# Altium PCB 2403_HDD_ROM_Emulator.PcbDoc
Units mm, origin at the board's own origin, x right, y up, seen from the top; angles counter-clockwise.
Board outline 99 x 213 mm, 2 copper layers (Top Layer, Bottom Layer); 49 components, 131 nets, 498 pads, 169 vias.
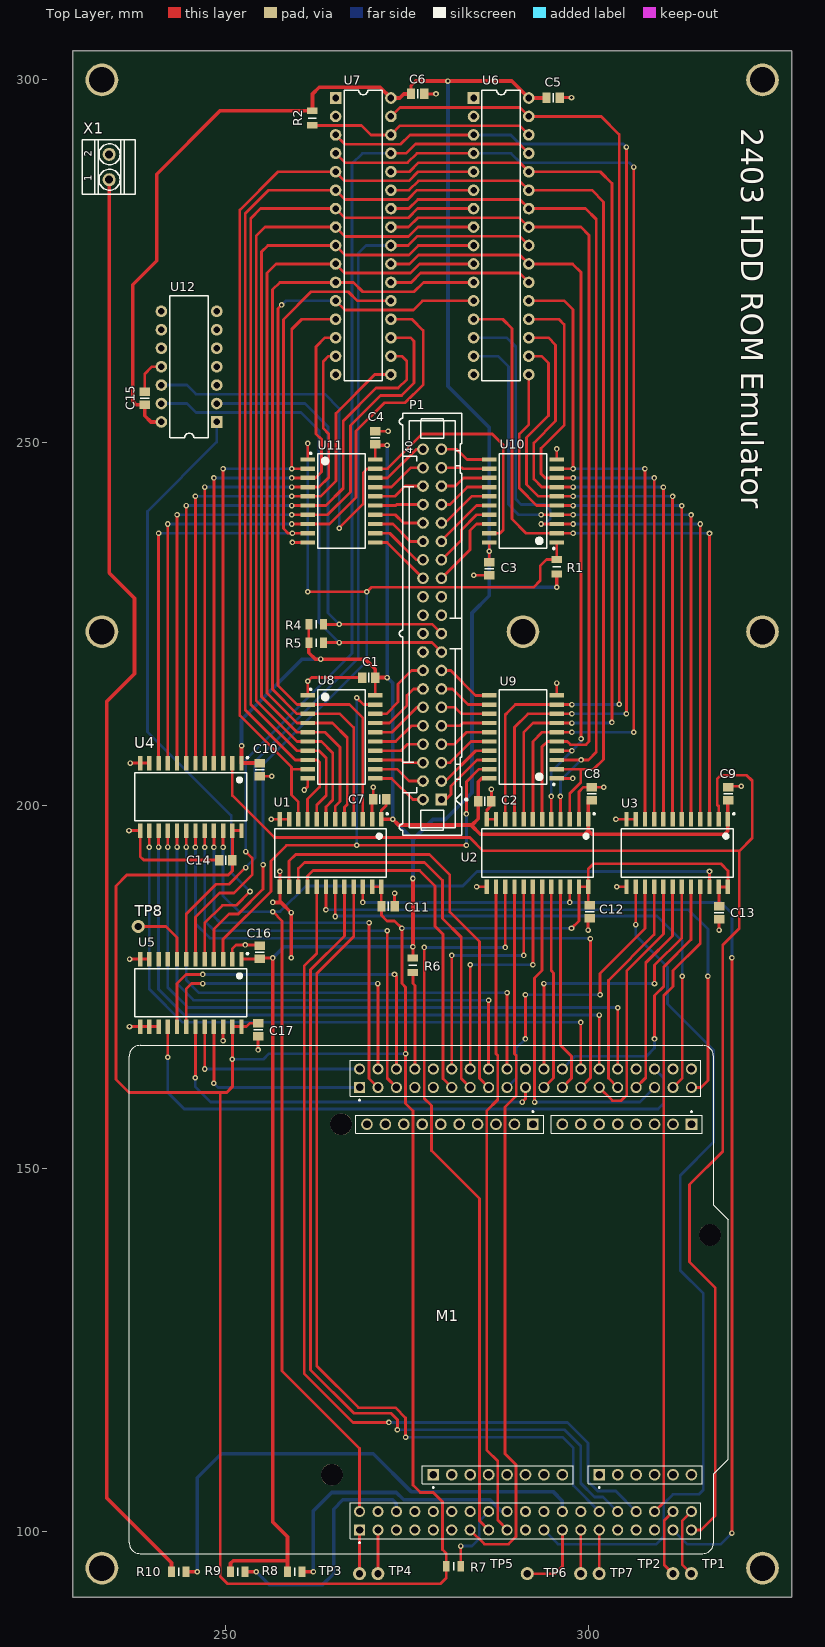
[diagram p0: Top Layer view]
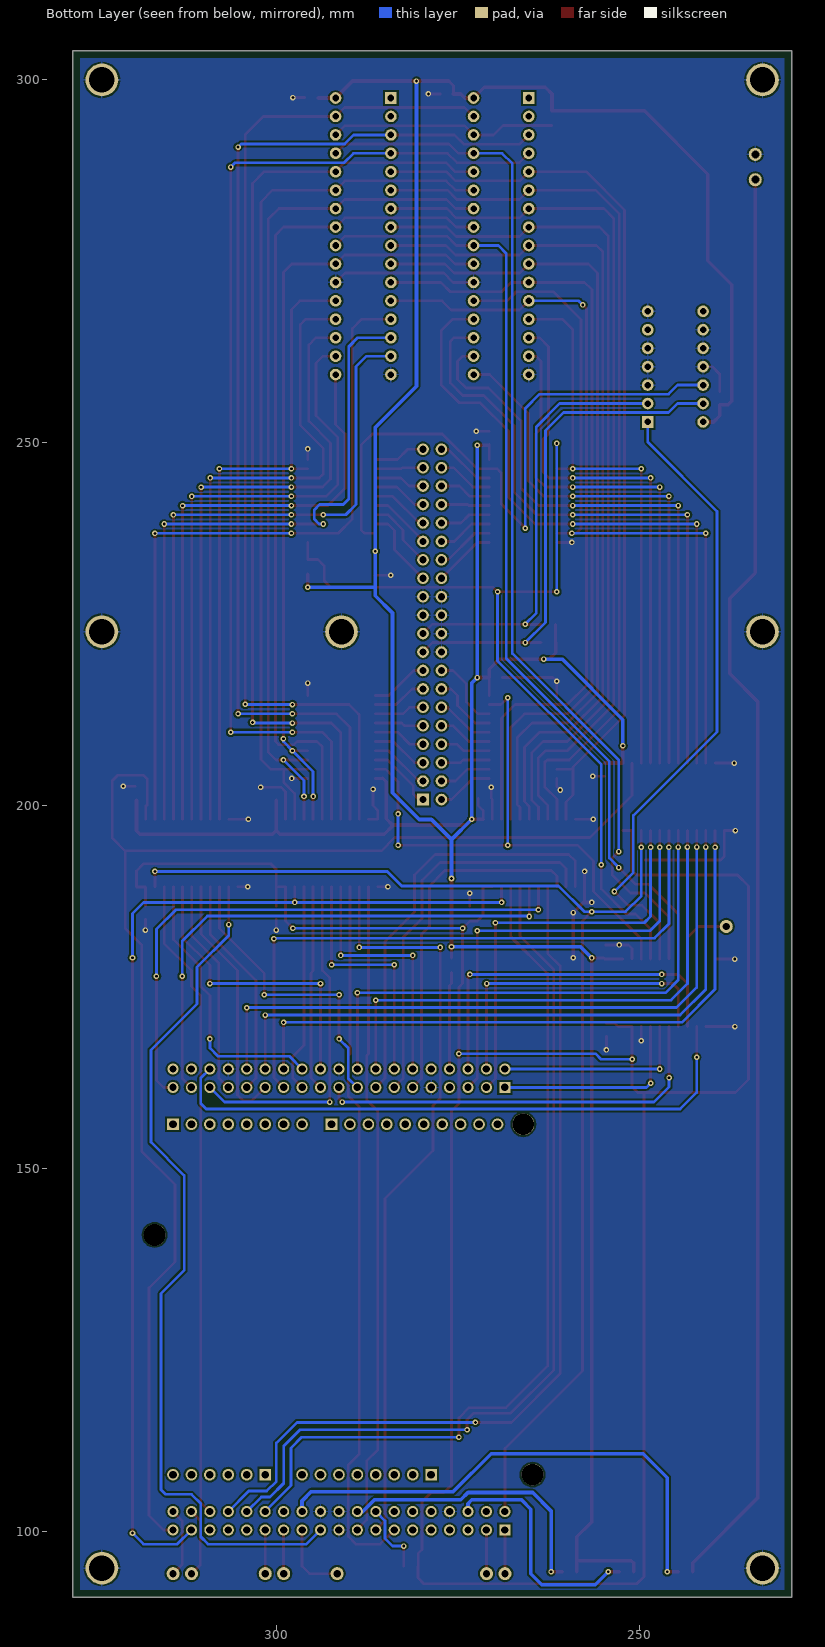
[diagram p1: Bottom Layer view, seen from below]
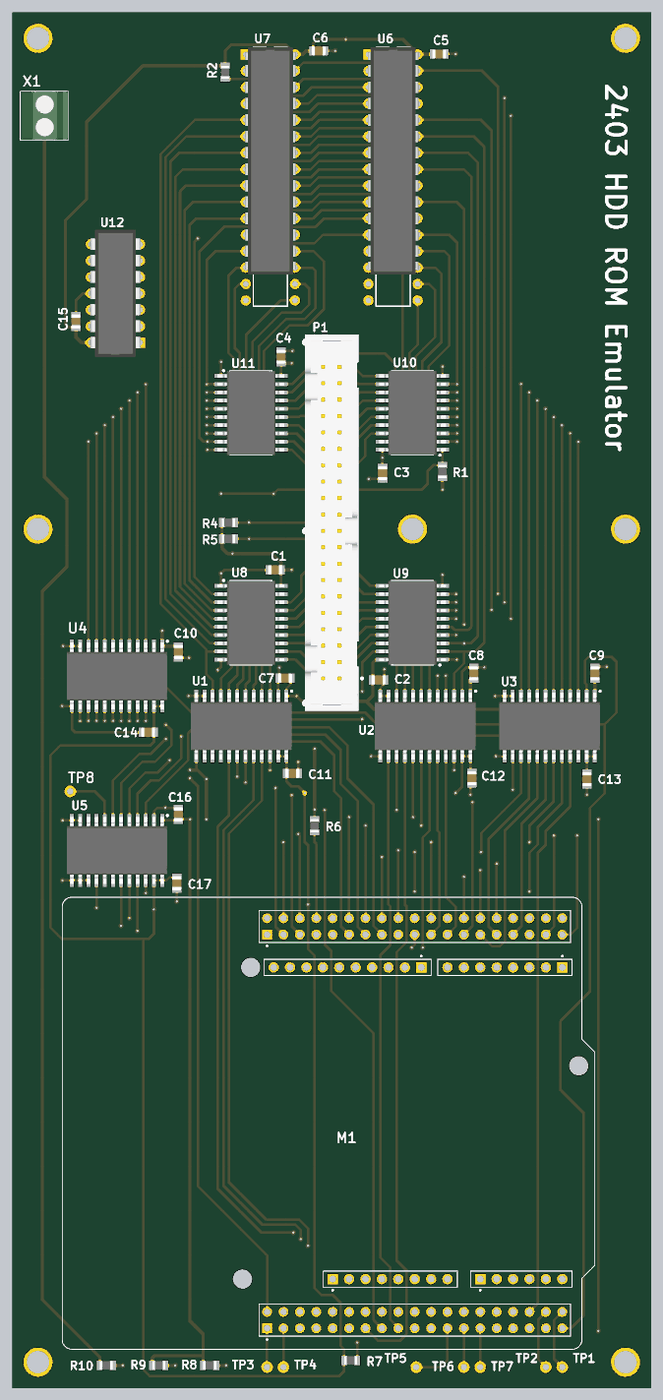
[diagram p2: 3D render of the assembled board from above, using the file's embedded part models]

## Layer stack, top to bottom
Top Layer: signal copper 0.0356
Dielectric: dielectric 0.32, FR-4, Dk 4.8
Bottom Layer: signal copper 0.0356

## Board outline
229,91 328,91 328,304 229,304 229,91

## Design rules (kind name [scope] priority, off if disabled: settings)
Clearance [All] p1: gap=0.254
HoleSize [All] p1: absolutevalues=TRUE maxlimit=5 minlimit=0.025 maxpercent=80.000 minpercent=20.000
PolygonConnect PolygonConnect_1 [IsVia vs IsNamedPolygon('Bot-Layer-GND')] p1: connectstyle=Direct reliefconductorwidth=0.254 reliefentries=4 polygonreliefangle="90 Angle" airgapwidth=0.254
PolygonConnect [All] p2: connectstyle=Relief reliefconductorwidth=0.254 reliefentries=4 polygonreliefangle="90 Angle" airgapwidth=0.254
RoutingVias [All] p1: holewidth=0.381 width=1.27 viastyle="Through Hole" minholewidth=0.254 minwidth=0.508 maxholewidth=0.711 maxwidth=1.27
SilkToSilkClearance [All] p1: silktosilkclearance=0.127
SilkToSolderMaskClearance [IsPad] p1: minsilkscreentomaskgap=0.127 clearancetoexposedcopper=TRUE
SolderMaskExpansion [All] p1: expansion=0.102
Width [All] p1: maxlimit=0.762 minlimit=0.254 preferedwidth=0.381
25 further rules are at their usual default settings.

## Classes and differential pairs
component class S2: C1 C2 C3 C4 C5 C6 R1 R2 U6 U7 U8 U9 U10 U11
component class S1: C7 C8 C9 C10 C11 C12 C13 C14 C16 C17 M1 R6 R7 R8 R9 R10 TP1 TP2 TP3 TP4 TP5 TP6 TP7 TP8 U1 U2 U3 U4 U5
component class 2403_HDD_ROM_Emulator: C15 P1 R4 R5 U12 X1

## Components (designator, comment, footprint, x,y, rotation, side; value= is the part's Value field where it differs from the comment)
C1 "0.1uF" 0805_CAPC2013X100N 269.748,217.678 r0 top
C2 "0.1uF" 0805_CAPC2013X100N 285.75,200.66 r180 top locked
C3 "0.1uF" 0805_CAPC2013X100N 286.385,232.664 r90 top
C4 "0.1uF" 0805_CAPC2013X100N 270.637,250.698 r270 top
C5 "0.1uF" 0805_CAPC2013X100N 295.148,297.561 r180 top locked
C6 "0.1uF" 0805_CAPC2013X100N 276.479,298.069 r180 top locked
C7 "0.1uF" 0805_CAPC2013X100N 271.272,200.914 r0 top locked
C8 "0.1uF" 0805_CAPC2013X100N 300.482,201.676 r270 top locked
C9 "0.1uF" 0805_CAPC2013X100N 319.278,201.676 r270 top
C10 "0.1uF" 0805_CAPC2013X100N 254.762,204.978 r90 top
C11 "0.1uF" 0805_CAPC2013X100N 272.415,186.182 r180 top locked
C12 "0.1uF" 0805_CAPC2013X100N 300.228,185.42 r90 top locked
C13 "0.1uF" 0805_CAPC2013X100N 318.008,185.293 r90 top locked
C14 "0.1uF" 0805_CAPC2013X100N 250.063,192.532 r0 top locked
C15 "0.1uF" 0805_CAPC2013X100N 238.887,256.159 r270 top
C16 "0.1uF" 0805_CAPC2013X100N 254.762,179.832 r90 top
C17 "0.1uF" 0805_CAPC2013X100N 254.508,169.164 r270 top
M1 "NUCLEO-F030R8" MODULE_NUCLEO-F030R8 278,132 r90 top locked
P1 "PLD-40" PLD40_3M_2540-6002RB 278.5,225 r90 top locked
R1 "1K" 0805_RESC2013X84N 295.656,232.918 r270 top locked
R2 "1K" 0805_RESC2013X84N 262,294.75 r90 top locked
R4 "1K" 0805_RESC2013X84N 262.5,225 r180 top locked
R5 "1K" 0805_RESC2013X84N 262.5,222.5 r180 top locked
R6 "0" 0805_RESC2013X84N 275.844,178.054 r90 top
R7 "0" 0805_RESC2013X84N 281.432,95.25 r180 top
R8 "0" 0805_RESC2013X84N 259.588,94.488 r180 top
R9 "0" 0805_RESC2013X84N 251.714,94.488 r180 top
R10 "0" 0805_RESC2013X84N 243.586,94.488 r180 top
TP1 "TEST_POINT" TEST2 314.198,94.234 r0 top
TP2 "TEST_POINT" TEST2 311.658,94.234 r90 top
TP3 "TEST_POINT" TEST2 268.478,94.234 r90 top
TP4 "TEST_POINT" TEST2 271.018,94.234 r90 top
TP5 "TEST_POINT" TEST2 291.592,94.234 r90 top
TP6 "TEST_POINT" TEST2 298.958,94.234 r90 top
TP7 "TEST_POINT" TEST2 301.498,94.234 r90 top
TP8 "TEST_POINT" TEST2 237.998,183.388 r90 top locked
U1 "74LVC4245A" SOIC127P1032X265-24N 264.5,193.5 r270 top locked
U2 "74LVC4245A" SOIC127P1032X265-24N 293,193.5 r270 top locked
U3 "74LVC4245A" SOIC127P1032X265-24N 312.25,193.5 r270 top
U4 "74LVC4245A" SOIC127P1032X265-24N 245.25,201.25 r270 top locked
U5 "74LVC4245A" SOIC127P1032X265-24N 245.25,174.25 r270 top locked
U6 "IS61C512" DIP32-300 288,281 r0 top locked
U7 "IS61C512" DIP32-300 269,281 r0 top locked
U8 "74LS245" SOIC127P1030X265-20N 266,209.5 r0 top locked
U9 "74LS245" SOIC127P1030X265-20N 291,209.5 r180 top locked
U10 "74LS245" SOIC127P1030X265-20N 291,242 r180 top locked
U11 "74LS245" SOIC127P1030X265-20N 266,242 r0 top locked
U12 "74ALS11AD" DIP14-300 245,260.5 r180 top
X1 "DG306-5.0 2" PHOENIX_3.5mm 234,288 r90 top

## Footprints (in the part's own frame and the unit in brackets; to place one, negate y for a bottom-side part, rotate by r counter-clockwise, add the part's x,y. Pads: shape width x height; smd on the part's side, far side on the other; paste and mask are expansions set on the pad)
0805_CAPC2013X100N [mm] "Capacitor, Non-Polarized, Chip; 2.00mm L X 1.25mm W X 0.9mm H, IPC Medium Density"
  rect 1.15x1.45 smd: 1(-0.9,0) 2(0.9,0)
  silkscreen extent 0,-0.63 0,0.63, body extent -1.1,-0.72 1.1,0.73, height 1
0805_RESC2013X84N [mm] "Chip Resistor, EIA 0805, Metric 2013, Body 2.03x1.27mm, IPC Medium Density"
  rect 0.95x1.45 smd: 1(-1,0) 2(1,0)
  silkscreen extent 0,-0.55 0,0.55, body extent -1.02,-0.63 1.02,0.64, height 0.84
DIP14-300 [mm] "DIP 14 Leads, Row Spacing 7.62 mm; Pitch 2.54 mm"
  rect 1.6x1.6 hole 0.9: 1(-3.81,7.62)
  round 1.6 hole 0.9: 2(-3.81,5.08) 3(-3.81,2.54) 4(-3.81,0) 5(-3.81,-2.54) 6(-3.81,-5.08) 7(-3.81,-7.62) 8(3.81,-7.62) 9(3.81,-5.08) 10(3.81,-2.54) 11(3.81,0) 12(3.81,2.54) 13(3.81,5.08) 14(3.81,7.62)
  silkscreen extent -2.65,-9.8 2.65,9.8, body extent -3.93,-9.84 3.94,9.85, height 5.33
DIP32-300 [mm] "DIP 32 Leads, Row Spacing 7.62mm; Pitch 2.54mm"
  rect 1.6x1.6 hole 0.9: 1(-3.81,16.51)
  round 1.6 hole 0.9: 2(-3.81,13.97) 3(-3.81,11.43) 4(-3.81,8.89) 5(-3.81,6.35) 6(-3.81,3.81) 7(-3.81,1.27) 8(-3.81,-1.27) 9(-3.81,-3.81) 10(-3.81,-6.35) 11(-3.81,-8.89) 12(-3.81,-11.43) 13(-3.81,-13.97) 14(-3.81,-16.51) 15(-3.81,-19.05) 16(-3.81,-21.59) 17(3.81,-21.59) 18(3.81,-19.05) 19(3.81,-16.51) 20(3.81,-13.97) 21(3.81,-11.43) 22(3.81,-8.89) 23(3.81,-6.35) 24(3.81,-3.81) 25(3.81,-1.27) 26(3.81,1.27) 27(3.81,3.81) 28(3.81,6.35) 29(3.81,8.89) 30(3.81,11.43) 31(3.81,13.97) 32(3.81,16.51)
  silkscreen extent -2.65,-22.47 2.65,17.59, body extent -3.93,-17.59 3.94,17.59, height 4.57
MODULE_NUCLEO-F030R8 [mm]
  rect 1.605x1.605 hole 1.07: CN5_1(24.13,-14.37) CN6_1(-24.13,-0.65) CN8_1(-24.13,-23.51) CN9_1(24.13,-36.21)
  round 1.605 hole 1.07: CN5_2(24.13,-11.83) CN5_3(24.13,-9.29) CN5_4(24.13,-6.75) CN5_5(24.13,-4.21) CN5_6(24.13,-1.67) CN5_7(24.13,0.87) CN5_8(24.13,3.41) CN5_9(24.13,5.95) CN5_10(24.13,8.49) CN6_2(-24.13,-3.19) CN6_3(-24.13,-5.73) CN6_4(-24.13,-8.27) CN6_5(-24.13,-10.81) CN6_6(-24.13,-13.35) CN6_7(-24.13,-15.89) CN6_8(-24.13,-18.43) CN8_2(-24.13,-26.05) CN8_3(-24.13,-28.59) CN8_4(-24.13,-31.13) CN8_5(-24.13,-33.67) CN8_6(-24.13,-36.21) CN9_2(24.13,-33.67) CN9_3(24.13,-31.13) CN9_4(24.13,-28.59) CN9_5(24.13,-26.05) CN9_6(24.13,-23.51) CN9_7(24.13,-20.97) CN9_8(24.13,-18.43)
  rect 1.53x1.53 hole 1.02: CN7_1(-31.75,9.51) CN10_1(29.21,9.51)
  round 1.53 hole 1.02: CN7_2(-29.21,9.51) CN7_3(-31.75,6.97) CN7_4(-29.21,6.97) CN7_5(-31.75,4.43) CN7_6(-29.21,4.43) CN7_7(-31.75,1.89) CN7_8(-29.21,1.89) CN7_9(-31.75,-0.65) CN7_10(-29.21,-0.65) CN7_11(-31.75,-3.19) CN7_12(-29.21,-3.19) CN7_13(-31.75,-5.73) CN7_14(-29.21,-5.73) CN7_15(-31.75,-8.27) CN7_16(-29.21,-8.27) CN7_17(-31.75,-10.81) CN7_18(-29.21,-10.81) CN7_19(-31.75,-13.35) CN7_20(-29.21,-13.35) CN7_21(-31.75,-15.89) CN7_22(-29.21,-15.89) CN7_23(-31.75,-18.43) CN7_24(-29.21,-18.43) CN7_25(-31.75,-20.97) CN7_26(-29.21,-20.97) CN7_27(-31.75,-23.51) CN7_28(-29.21,-23.51) CN7_29(-31.75,-26.05) CN7_30(-29.21,-26.05) CN7_31(-31.75,-28.59) CN7_32(-29.21,-28.59) CN7_33(-31.75,-31.13) CN7_34(-29.21,-31.13) CN7_35(-31.75,-33.67) CN7_36(-29.21,-33.67) CN7_37(-31.75,-36.21) CN7_38(-29.21,-36.21) CN10_2(31.75,9.51) CN10_3(29.21,6.97) CN10_4(31.75,6.97) CN10_5(29.21,4.43) CN10_6(31.75,4.43) CN10_7(29.21,1.89) CN10_8(31.75,1.89) CN10_9(29.21,-0.65) CN10_10(31.75,-0.65) CN10_11(29.21,-3.19) CN10_12(31.75,-3.19) CN10_13(29.21,-5.73) CN10_14(31.75,-5.73) CN10_15(29.21,-8.27) CN10_16(31.75,-8.27) CN10_17(29.21,-10.81) CN10_18(31.75,-10.81) CN10_19(29.21,-13.35) CN10_20(31.75,-13.35) CN10_21(29.21,-15.89) CN10_22(31.75,-15.89) CN10_23(29.21,-18.43) CN10_24(31.75,-18.43) CN10_25(29.21,-20.97) CN10_26(31.75,-20.97) CN10_27(29.21,-23.51) CN10_28(31.75,-23.51) CN10_29(29.21,-26.05) CN10_30(31.75,-26.05) CN10_31(29.21,-28.59) CN10_32(31.75,-28.59) CN10_33(29.21,-31.13) CN10_34(31.75,-31.13) CN10_35(29.21,-33.67) CN10_36(31.75,-33.67) CN10_37(29.21,-36.21) CN10_38(31.75,-36.21)
  round 3 hole 3 unplated: ""(-24.13,13.32) ""(8.89,-38.75) ""(24.13,12.05)
  silkscreen extent -35,-41.25 35,41.25
PHOENIX_3.5mm [mm] "Terminal Block, 10A 160V, Pitch 3.5mm, 2 Positions, Screw Connection"
  round 1.8 hole 1.1: 1(-1.75,0) 2(1.75,0)
  silkscreen extent -3.75,-3.6 3.75,3.7, body extent -3.75,-3.6 3.75,3.7, height 8.5
PLD40_3M_2540-6002RB [mm] "40 Contacts - Straight .100\" x .100\" Low Profile Four-Wall Header"
  rect 1.6x1.6 hole 1: 1(-24.13,-1.27)
  round 1.6 hole 1: 2(-24.13,1.27) 3(-21.59,-1.27) 4(-21.59,1.27) 5(-19.05,-1.27) 6(-19.05,1.27) 7(-16.51,-1.27) 8(-16.51,1.27) 9(-13.97,-1.27) 10(-13.97,1.27) 11(-11.43,-1.27) 12(-11.43,1.27) 13(-8.89,-1.27) 14(-8.89,1.27) 15(-6.35,-1.27) 16(-6.35,1.27) 17(-3.81,-1.27) 18(-3.81,1.27) 19(-1.27,-1.27) 20(-1.27,1.27) 21(1.27,-1.27) 22(1.27,1.27) 23(3.81,-1.27) 24(3.81,1.27) 25(6.35,-1.27) 26(6.35,1.27) 27(8.89,-1.27) 28(8.89,1.27) 29(11.43,-1.27) 30(11.43,1.27) 31(13.97,-1.27) 32(13.97,1.27) 33(16.51,-1.27) 34(16.51,1.27) 35(19.05,-1.27) 36(19.05,1.27) 37(21.59,-1.27) 38(21.59,1.27) 39(24.13,-1.27) 40(24.13,1.27)
  silkscreen extent -29.06,-4.85 29.06,4.52, body extent -29.06,-4.06 29.06,4.57, height 9.65
SOIC127P1030X265-20N [mm] "SOIC 20, Pitch 1.27mm - Body 7.5x12.8mm, IPC Medium Density"
  rect 2x0.6 smd: 1(-4.65,5.715) 2(-4.65,4.445) 3(-4.65,3.175) 4(-4.65,1.905) 5(-4.65,0.635) 6(-4.65,-0.635) 7(-4.65,-1.905) 8(-4.65,-3.175) 9(-4.65,-4.445) 10(-4.65,-5.715) 11(4.65,-5.715) 12(4.65,-4.445) 13(4.65,-3.175) 14(4.65,-1.905) 15(4.65,-0.635) 16(4.65,0.635) 17(4.65,1.905) 18(4.65,3.175) 19(4.65,4.445) 20(4.65,5.715)
  silkscreen extent -4.37,-6.5 3.25,6.67, body extent -5.18,-6.5 5.18,6.5, height 1.68
SOIC127P1032X265-24N [mm] "SOIC, 1.27mm Pitch; 24 Pin,7.50mm W X 15.40mm L X 2.65mm H Body, IPC Medium Density"
  rect 2x0.6 smd: 1(-4.65,6.985) 2(-4.65,5.715) 3(-4.65,4.445) 4(-4.65,3.175) 5(-4.65,1.905) 6(-4.65,0.635) 7(-4.65,-0.635) 8(-4.65,-1.905) 9(-4.65,-3.175) 10(-4.65,-4.445) 11(-4.65,-5.715) 12(-4.65,-6.985) 13(4.65,-6.985) 14(4.65,-5.715) 15(4.65,-4.445) 16(4.65,-3.175) 17(4.65,-1.905) 18(4.65,-0.635) 19(4.65,0.635) 20(4.65,1.905) 21(4.65,3.175) 22(4.65,4.445) 23(4.65,5.715) 24(4.65,6.985)
  silkscreen extent -5.52,-7.7 3.32,7.93, body extent -5.18,-7.8 5.18,7.8, height 1.68
TEST2 [mm]
  round 1.8 hole 1: 1(0,0)

## Part data
C1 C2 C3 C4 C5 C6 C7 C8 C9 C10 C11 C12 C13 C14 C15 C16 C17: library part "Cap SMD", "Capacitor SMD"
M1: "STM32F030R8, mbed-Enabled Development Nucleo-64 STM32F0 ARM® Cortex®-M0 MCU 32-Bit Embedded Evaluation Board"
P1: "40pin 2.54mm pitch plug"
R1 R2 R4 R5 R6 R7 R8 R9 R10: library part "Resistor SMD L", "SMD Resistor"
TP1 TP2 TP3 TP4 TP5 TP6 TP7 TP8: "Test point"
U1 U2 U3 U4 U5: "Octal Bus Transceiver and 3.3-V to 5-V Shifter / With 3-State Outputs"
U6 U7: "64KB static RAM"
U8 U9 U10 U11: library part 74ABT245, "Bus former"
U12: "Ê1533ËÈ3 Triple 3-Input Positive-AND Gate"
X1: library part CON_Plug2, "2pin connector"

## Free pads (board coordinates)
  round 4.5 hole 3.5: 0(233,95) 0(233,224) 0(233,300) 0(291,224) 0(324,95) 0(324,224) 0(324,300)

## Via types
v1: diameter 0.762, hole 0.381, Top Layer to Bottom Layer, tented both sides, 168 vias
v2: diameter 0.762, hole 0.381, Top Layer to Bottom Layer, 1 vias

## Nets (pads, with @x,y where several pads share a name; then routed paths per layer and width w, separated by ;. In a path a pad name is that pad's centre, name@x,y a point inside that pad or via, vN(x,y) a via of type N, cw(c..) or ccw(c..) an arc to the next point about the centre after c; other vN are vias at no path point)
+3.3V: C11.2 C12.2 C13.2 C14.2 C17.1 R7.2 U1.23 U1.24 U2.23 U2.24 U3.23 U3.24 U4.23 U4.24 U5.23 U5.24 | length 365.8
  Top Layer w0.381: U5.23 U5.24 252.912,169.6 253.376,170.064 C17.1 ; U4.23 U4.24 ; U1.23 U1.24 ; v1(274.828,165.862) 274.828,159.004 275.844,157.988 275.844,106.426 276.86,105.41 278.638,105.41 279.908,104.14 279.908,97.536 280.432,97.012 R7.2 ; v1(297.688,183.134) 298.715,184.161 U2.23 299.963,188.85 U2.24@299.974,188.839 ; C12.2@299.985,186.204 U2.24 299.985,191.273 300.736,192.024 318.262,192.024 319.235,191.051 U3.24 ; C13.2 318.008,188.807 U3.24@319.192,188.807
  Top Layer w0.4: C14.2 250.963,191.019 250.444,190.5 236.474,190.5 234.95,188.976 234.95,162.306 236.728,160.528 249.301,160.528 ; U5.23 250.965,161.303 250.19,160.528 249.301,160.528 ; C14.2@250.965,192.534 U4.23 ; C11.2@271.485,186.212 U1.24 ; C11.2 271.515,184.923 272.288,184.15 273.304,184.15 v2(274.32,183.134) 274.32,175.514 274.828,175.006 v1(274.828,165.862) ; R7.2 280.432,93.615 279.654,92.837 250.317,92.837 249.301,93.853 249.301,160.528
  Bottom Layer w0.381: v1(250.952,165.1) 255.27,165.1 256.032,165.862 v1(274.828,165.862) ; v2(274.32,183.134) v1(297.688,183.134)
+5V: C1.2 C2.2 C3.2 C4.2 C5.2 C6.2 C7.2 C8.2 C9.2 C10.2 C15.2 C16.1 R1.2 R2.2 R4.2 R5.2 R6.2 R8.2 R9.2 U1.1 U2.1 U3.1 U4.1 U5.1 U6.32 U7.32 U8.20 U9.20 U10.20 U11.20 U12.14 | length 532.8
  Top Layer w0.381: C15.2@238.876,255.27 C15.2 ; U5.1 C16.1@254.73,178.9 ; C16.1@254.884,179.054 v1(256.54,179.054) ; R5.2 R4.2 ; U11.20@270.637,247.728 C4.2 ; U8.20 C1.2@270.65,217.678 ; U1.1 271.485,199.349 272.172,200.036 C7.2@272.172,201.041 ; C6.2 275.579,299.201 276.225,299.847 ; R6.2 v1(275.844,180.594) ; 285.319,203.785 U9.20 ; C3.2@286.35,233.853 v1(286.35,235.069) U10.20
  Top Layer w0.5: C15.2@238.876,255.27 237.744,255.27 237.236,255.778 237.236,271.78 240.538,275.082 240.538,287.02 249.268,295.75 R2.2 262,298.068 262.932,299 271.32,299 U7.32 274.015,297.51 274.574,298.069 C6.2 ; C15.2 238.887,253.746 239.753,252.88 U12.14 ; R9.2 250.714,95.647 251.079,96.012 258.572,96.012 ; v1(252.235,208.267) U4.1 C10.2@254.74,205.9 ; v1(256.54,179.054) 256.54,101.346 258.572,99.314 258.572,96.012 ; R8.2@258.572,94.488 258.572,96.012 ; R5.2 261.5,221.1 262.382,220.218 v1(263.144,220.218) 269.24,220.218 270.65,218.808 270.65,217.678 v1(272.288,217.678) ; C4.2@270.753,249.682 v1(272.288,249.682) ; U1.1 v1(273.05,198.15) 273.842,197.358 283.972,197.358 ; v1(275.844,180.594) v1(275.844,189.992) ; 276.225,299.847 v1(280.67,299.847) 289.473,299.847 U6.32 C5.2@294.197,297.51 ; 285.319,203.785 284.85,203.316 284.85,198.236 283.972,197.358 ; v1(295.656,230.124) R1.2 ; C8.2@299.985,200.765 U2.1 299.985,196.607 ; C9.2@319.235,200.733 U3.1 319.235,196.553 318.77,196.088 300.504,196.088 299.985,196.607 ; 283.972,197.358 283.909,197.294 285.115,196.088 299.466,196.088 299.985,196.607
  Bottom Layer w0.5: v1(252.235,208.267) 252.235,211.849 260.604,220.218 v1(263.144,220.218) ; v1(256.54,179.054) 258.08,180.594 v1(275.844,180.594) ; v1(272.288,249.682) v1(272.288,217.678) 273.05,216.916 v1(273.05,198.15) 275.844,195.356 ; v1(275.844,189.992) 275.844,195.356 ; v1(280.67,299.847) 280.67,257.81 286.35,252.13 v1(286.35,235.069) 286.35,228.946 283.972,226.568 283.972,201.803 280.289,198.12 278.608,198.12 275.844,195.356 ; 286.385,230.124 v1(295.656,230.124)
A0: U1.3 U6.12 U7.12 U8.2 | length 107.9
  Top Layer w0.381: v1(257.75,269) 257.25,268.5 257.25,216.587 259.892,213.945 U8.2 267.105,213.945 268.945,212.105 U1.3 ; U7.12 266.46,268.3 275.9,268.3 277.17,269.57 U6.12
  Bottom Layer w0.381: v1(257.75,269) 258.32,269.57 U7.12
A1: U1.4 U6.11 U7.11 U8.3 | length 110.2
  Top Layer w0.381: U1.4 267.675,210.775 265.775,212.675 U8.3 259.892,212.675 256.5,216.067 256.5,271.105 257.505,272.11 U7.11 267.64,272.11 268.934,270.816 276.016,270.816 277.31,272.11 U6.11
A2: U1.5 U6.10 U7.10 U8.4 | length 112.8
  Top Layer w0.381: U1.5 266.405,199.805 266.8,200.2 266.8,209.375 264.77,211.405 U8.4 259.892,211.405 255.75,215.547 255.75,273.403 256.997,274.65 U7.10 266.44,273.4 275.5,273.4 276.75,274.65 U6.10
A3: U1.6 U6.9 U7.9 U8.5 | length 115.8
  Top Layer w0.381: U1.6 265.135,199.935 265.8,200.6 265.8,208.075 263.74,210.135 U8.5 259.892,210.135 255,215.027 255,276.336 255.854,277.19 U7.9 266.48,275.9 275.3,275.9 276.59,277.19 U6.9
A4: U1.7 U6.8 U7.8 U8.6 | length 118.6
  Top Layer w0.381: U1.7 263.865,199.865 264.8,200.8 264.8,207.3 263.235,208.865 U8.6 259.892,208.865 254.25,214.507 254.25,278.507 255.473,279.73 U7.8 266.482,278.438 275.238,278.438 276.53,279.73 U6.8
A5: U1.8 U6.7 U7.7 U8.7 | length 121.7
  Top Layer w0.381: U1.8 262.595,200.095 263.9,201.4 263.9,206.6 262.905,207.595 U8.7 259.892,207.595 253.5,213.987 253.5,280.932 254.838,282.27 U7.7 266.46,281 275.2,281 276.47,282.27 U6.7
A6: U1.9 U6.6 U7.6 U8.8 | length 124
  Top Layer w0.381: U1.9 261.325,200.925 263,202.6 263,206 262.675,206.325 U8.8 259.638,206.325 252.75,213.213 252.75,281.579 255.981,284.81 U7.6 266.475,283.525 275.125,283.525 276.41,284.81 U6.6
A7: U1.10 U6.5 U7.5 U8.9 | length 124.9
  Top Layer w0.381: U1.10 260.055,200.545 259.1,201.5 259.1,205.055 ; U8.9 259.1,205.055 ; U6.5 276.55,287.35 275.3,286.1 266.44,286.1 U7.5 257.251,287.35 252,282.099 252,212.439 259.1,205.339 259.1,205.055
A8: U2.3 U6.27 U7.27 U9.2 | length 122.4
  Top Layer w0.381: U7.27 275.31,284.81 276.6,286.1 290.52,286.1 U6.27 300.49,284.81 302.1,283.2 302.1,206.4 300.755,205.055 U9.2 ; U2.3 297.445,201.687 298.958,203.2 298.958,205.055
A9: U2.4 U6.26 U7.26 U9.3 | length 118.6
  Top Layer w0.381: U7.26 275.27,282.27 276.519,283.519 290.561,283.519 U6.26 299.63,282.27 301.1,280.8 301.1,207.4 300.025,206.325 v1(299,206.325) U9.3 ; U2.4 v1@296.175,201.295
  Bottom Layer w0.381: v1@296.175,201.295 296.175,203.5 v1(299,206.325)
  other v1: 296.164,201.295
A10: U2.5 U6.23 U7.23 U9.4 | length 106.8
  Top Layer w0.381: U7.23 275.35,274.65 276.6,275.9 290.56,275.9 U6.23 297.85,274.65 299,273.5 v1(299,209.25) ; U2.5 v1@294.905,201.295 ; U9.4 v1(297.75,207.595)
  Bottom Layer w0.381: v1@294.905,201.295 294.905,204.75 v1(297.75,207.595) 299,208.845 v1(299,209.25)
  other v1: 294.894,201.295
A11: U2.6 U6.25 U7.25 U9.5 | length 115.7
  Top Layer w0.381: U7.25 275.23,279.73 276.5,281 290.54,281 U6.25 298.97,279.73 300.1,278.6 300.1,208.85 299.675,208.424 297.544,208.424 297.103,208.865 U9.5 294.365,208.865 293.635,208.135 U2.6
A12: U2.7 U6.4 U7.4 U9.6 | length 145.9
  Top Layer w0.381: U7.4 266.48,288.6 275.1,288.6 276.39,289.89 U6.4 ; U2.7 292.365,208.865 293.635,210.135 U9.6 v1(297.75,210.135) ; v1(306.25,210.135) v1(306.25,288)
  Bottom Layer w0.381: U6.4 289.36,289.89 290.656,288.595 305.655,288.595 v1(306.25,288) ; v1(297.75,210.135) v1(306.25,210.135)
A13: U2.8 U6.28 U7.28 U9.7 | length 130.9
  Top Layer w0.381: U7.28 275.35,287.35 276.6,288.6 290.56,288.6 U6.28 301.65,287.35 303.25,285.75 v1(303.25,211.5) ; U2.8 291.095,210.095 292.405,211.405 U9.7 v1(297.75,211.405)
  Bottom Layer w0.381: v1(297.75,211.405) v1@303.155,211.405
A14: U2.9 U6.3 U7.3 U9.8 | length 148.8
  Top Layer w0.381: U7.3 266.479,291.141 274.141,291.141 275.43,292.43 U6.3 ; U2.9 289.825,210.825 291.675,212.675 U9.8 v1(297.75,212.675) ; v1(305.25,212.675) v1(305.25,290.75)
  Bottom Layer w0.381: U6.3 289.32,292.43 290.565,291.185 304.815,291.185 v1(305.25,290.75) ; v1(297.75,212.675) v1(305.25,212.675)
A15: U2.10 U6.31 U7.31 U9.9 | length 142.6
  Top Layer w0.381: U7.31 274.055,296.215 290.565,296.215 U6.31 301.78,294.97 304.25,292.5 v1(304.25,214) ; U2.10 288.555,212.555 289,213 289.945,213.945 U9.9 v1(297.75,213.945)
  Bottom Layer w0.381: v1(297.75,213.945) v1@304.195,213.945
D0: U3.3 U6.13 U10.2 | length 99.4
  Top Layer w0.381: U6.13 288.22,267.03 289.5,265.75 289.5,239.5 291.445,237.555 U10.2 v1(297.9,237.555) ; U3.3 v1(316.695,237.525)
  Bottom Layer w0.381: v1(297.9,237.555) v1@316.665,237.555
D1: U3.4 U6.14 U10.3 | length 98.1
  Top Layer w0.381: v1(293.5,238.825) U10.3 v1(297.9,238.825) ; U3.4 v1(315.425,238.825)
  Bottom Layer w0.381: U6.14 288.76,264.49 290,263.25 290,242.25 290.75,241.5 294,241.5 294.75,240.75 294.75,239.5 294.075,238.825 v1(293.5,238.825) ; v1(297.9,238.825) v1(315.425,238.825)
D2: U3.5 U6.15 U10.4 | length 92.1
  Top Layer w0.381: v1(293.5,240.095) U10.4 v1(297.9,240.095) ; U3.5 v1(314.155,240.075)
  Bottom Layer w0.381: U6.15 287.55,261.95 289,260.5 289,241.5 290.405,240.095 v1(293.5,240.095) ; v1(297.9,240.095) v1@314.135,240.095
D3: U3.6 U6.17 U10.5 | length 82.8
  Top Layer w0.381: U6.17 291.81,252.56 290.5,251.25 290.5,243.75 292.885,241.365 U10.5 v1(297.9,241.365) ; U3.6 v1(312.885,241.35)
  Bottom Layer w0.381: v1(297.9,241.365) v1@312.87,241.365
D4: U3.7 U6.18 U10.6 | length 86.3
  Top Layer w0.381: U6.18 293.55,261.95 294.5,261 294.5,253.75 291.5,250.75 291.5,244.25 293.115,242.635 U10.6 v1(297.9,242.635) ; U3.7 v1(311.615,242.625)
  Bottom Layer w0.381: v1(297.9,242.635) v1@311.605,242.635
D5: U3.8 U6.19 U10.7 | length 87.9
  Top Layer w0.381: U6.19 294.51,264.49 295.5,263.5 295.5,253 292.5,250 292.5,245 293.595,243.905 U10.7 v1(297.9,243.905) ; U3.8 v1(310.345,243.9)
  Bottom Layer w0.381: v1(297.9,243.905) v1@310.34,243.905
D6: U3.9 U6.20 U10.8 | length 89.9
  Top Layer w0.381: U6.20 295.97,267.03 296.672,266.328 296.672,252.422 293.5,249.25 293.5,245.75 294.075,245.175 U10.8 v1(297.9,245.175) ; U3.9 v1(309.075,245.175)
  Bottom Layer w0.381: v1(297.9,245.175) v1(309.075,245.175)
D7: U3.10 U6.21 U10.9 | length 89
  Top Layer w0.381: U6.21 296.7,269.57 297.9,268.37 v1(297.9,246.445) U10.9 ; U3.10 v1(307.805,246.45)
  Bottom Layer w0.381: v1(297.9,246.445) v1@307.8,246.445
D8: U4.3 U7.13 U11.2 | length 78
  Top Layer w0.381: U4.3 v1(249.695,246.425) ; U11.2 v1(259.15,246.445) 259.15,265.65 260.53,267.03 U7.13
  Bottom Layer w0.381: v1(249.695,246.425) 259.13,246.425 v1(259.15,246.445)
D9: U4.4 U7.14 U11.3 | length 75.2
  Top Layer w0.381: U4.4 v1(248.425,245.175) ; v1(259.15,245.175) U11.3 262.425,245.175 263.25,246 263.25,250.5 262.5,251.25 262.5,263.25 263.74,264.49 U7.14
  Bottom Layer w0.381: v1(248.425,245.175) v1(259.15,245.175)
D10: U4.5 U7.15 U11.4 | length 73.9
  Top Layer w0.381: U4.5 v1(247.155,243.905) ; v1(259.15,243.905) U11.4 262.905,243.905 264.25,245.25 264.25,251.25 263.5,252 263.5,261.25 264.2,261.95 U7.15
  Bottom Layer w0.381: v1(247.155,243.905) v1(259.15,243.905)
D11: U4.6 U7.17 U11.5 | length 76.1
  Top Layer w0.381: U4.6 v1(245.885,242.635) ; v1(259.15,242.635) U11.5 263.135,242.635 265.25,244.75 265.25,254.074 270.586,259.41 U7.17
  Bottom Layer w0.381: v1(245.885,242.635) v1(259.15,242.635)
D12: U4.7 U7.18 U11.6 | length 83.5
  Top Layer w0.381: U4.7 v1(244.615,241.365) ; v1(259.15,241.365) U11.6 263.865,241.365 266.25,243.75 266.25,253.042 270.764,257.556 273.806,257.556 275,258.75 275,261.25 274.3,261.95 U7.18
  Bottom Layer w0.381: v1(244.615,241.365) v1(259.15,241.365)
D13: U4.8 U7.19 U11.7 | length 88.9
  Top Layer w0.381: U4.8 v1(243.345,240.095) ; v1(259.15,240.095) U11.7 264.095,240.095 267.25,243.25 267.25,252.391 271.399,256.54 274.29,256.54 276,258.25 276,264 275.51,264.49 U7.19
  Bottom Layer w0.381: v1(243.345,240.095) v1(259.15,240.095)
D14: U4.9 U7.20 U11.8 | length 94
  Top Layer w0.381: U4.9 v1(242.075,238.825) ; v1(259.15,238.825) U11.8 264.325,238.825 268,242.5 268,251.617 271.907,255.524 274.774,255.524 277.25,258 277.25,265.5 275.72,267.03 U7.20
  Bottom Layer w0.381: v1(242.075,238.825) v1(259.15,238.825)
D15: U4.10 U7.21 U11.9 | length 99.4
  Top Layer w0.381: U4.10 v1(240.805,237.555) ; U11.9 v1(259.25,237.555) 258.645,237.555 258,238.2 258,267 261.82,270.82 266.93,270.82 268.18,269.57 U7.21
  Bottom Layer w0.381: v1(240.805,237.555) v1(259.25,237.555)
GND: C1.1 C2.1 C3.1 C4.1 C5.1 C6.1 C7.1 C8.1 C9.1 C10.1 C11.1 C12.1 C13.1 C14.1 C15.1 C16.2 C17.2 M1.CN7_8 M1.CN7_19 M1.CN7_20 M1.CN7_22 M1.CN10_9 M1.CN10_20 M1.CN10_32 P1.18 P1.20 P1.21 P1.22 P1.23 P1.24 pad.0 U1.2 U1.11 U1.12 U1.13 U2.2 U2.11 U2.12 U2.13 U3.11 U3.12 U3.13 U4.11 U4.12 U4.13 U5.2 U5.11 U5.12 U5.13 U5.14 U5.15 U5.22 U6.16 U6.22 U7.16 U7.22 U8.1 U8.10 U9.1 U9.10 U10.10 U11.10 U12.3 U12.4 U12.5 U12.7 U12.9 U12.10 U12.11 X1.2 | length 133
  Top Layer w0.381: v1(236.732,196.6) U4.13 238.265,193.027 238.76,192.532 C14.1 ; v1(236.8,169.6) U5.13 U5.14 U5.15 ; v1(236.812,178.9) U5.12 U5.11 ; v1(236.888,205.9) U4.12 U4.11 ; C15.1 238.887,259.461 239.926,260.5 U12.11 ; v1(249.695,167.64) U5.22 ; U5.2 250.965,180.327 251.486,180.848 C16.2@254.646,180.848 ; v1(254.508,166.37) C17.2 ; C10.1 v1(256.402,204.078) ; v1(256.316,198.15) U1.12 U1.11 ; 257.515,186.858 U1.13 v1(257.515,190.967) ; v1(259.25,236.285) U11.10 ; v1(260.858,202.184) 261.35,202.676 U8.10 ; U8.1 v1(261.35,217.154) 261.874,217.678 C1.1 ; U1.2 C7.1@270.215,200.884 ; C7.1@270.372,201.041 v1(270.372,202.554) ; C4.1 v1(272.426,251.598) ; U7.22 275.61,272.11 276.9,273.4 290.52,273.4 U6.22 ; C11.1 v1(273.315,187.949) ; C6.1 v1(279.019,298.069) ; v1@284.237,231.764 C3.1 ; v1(284.606,188.85) U2.13 ; v1(286.65,202.3) 286.65,200.036 286.015,199.401 U2.12 U2.11 ; U9.1 v1(297.865,203.785) ; U9.10 v1(295.65,216.91) ; U10.10 v1(295.65,249.168) ; C5.1 v1(297.688,297.561) ; U2.2 298.715,201.941 299.35,202.576 C8.1 v1(302.144,202.576) ; v1(299.974,182.88) C12.1@299.974,184.393 ; v1(303.814,198.15) U3.12 U3.11 ; v1(303.912,188.85) U3.13 ; v1(318.008,182.88) C13.1 ; C9.1@319.394,202.692 v1(321.056,202.692)
  Top Layer w0.5: v1(256.54,186.69) 257.683,186.69 v1(259.08,185.293) v1(259.08,179.07)
  other v1: 252.73,180.848 284.226,231.775
NetM1_CN7_1: M1.CN7_1 TP3.1 | length 6
  Top Layer w0.381: TP3.1 M1.CN7_1@268.478,100.238
NetM1_CN7_2: M1.CN7_2 U3.22 U4.22 | length 168.9
  Top Layer w0.381: v1(249.695,194.31) U4.22 ; v1(256.54,185.42) 257.81,184.15 257.81,122.174 268.49,111.494 M1.CN7_2 ; U3.22 v1(316.695,190.965)
  Bottom Layer w0.381: v1(249.695,194.31) 249.695,187.605 251.88,185.42 v1(256.54,185.42) 257.556,185.42 261.112,188.976 282.702,188.976 284.691,190.965 v1(316.695,190.965)
NetM1_CN7_3: M1.CN7_3 TP4.1 | length 6
  Top Layer w0.381: TP4.1 M1.CN7_3@271.018,100.238
NetM1_CN7_6: M1.CN7_6 R9.1 | length 32.9
  Top Layer w0.5: R9.1 v1(254.254,94.488)
  Bottom Layer w0.5: v1(254.254,94.488) 256.032,92.71 263.398,92.71 264.922,94.234 264.922,103.124 266.192,104.394 273.05,104.394 273.57,103.874 M1.CN7_6
NetM1_CN7_13: M1.CN7_13 U2.16 | length 98.4
  Top Layer w0.381: M1.CN7_13 285.682,98.298 289.03,98.298 290.057,99.325 290.057,109.231 288.544,110.744 288.544,158.496 290.068,160.02 290.068,165.608 289.825,165.851 U2.16
NetM1_CN7_15: M1.CN7_15 U2.15 | length 103.4
  Top Layer w0.381: v1(277.4,180.492) 277.4,159.7 278.4,158.7 278.4,152.5 285,145.9 285,101.52 M1.CN7_15 ; v1@288.555,180.5 U2.15
  Bottom Layer w0.381: v1(277.4,180.492) v1(288.555,180.492)
NetM1_CN7_16: M1.CN7_16 R7.1 | length 10
  Top Layer w0.381: R7.1 v1(282.432,98.028)
  Bottom Layer w0.381: v1(282.432,98.028) 283.956,98.028 284.988,99.06 284.988,101.508 M1.CN7_16
NetM1_CN7_17: M1.CN7_17 U2.14 | length 90.4
  Top Layer w0.381: U2.14 287.285,165.851 287.528,165.608 287.528,159.512 286.004,157.988 286.004,111.252 287.528,109.728 287.528,101.6 M1.CN7_17@288.81,100.318
NetM1_CN7_18: M1.CN7_18 R8.1 | length 38.7
  Top Layer w0.5: R8.1 v1(262.128,94.488)
  Bottom Layer w0.5: v1(262.128,94.488) 262.128,102.87 264.668,105.41 273.558,105.41 274.574,104.394 286.461,104.394 288.065,102.79 M1.CN7_18
NetM1_CN7_21: M1.CN7_21 U3.14 | length 119.3
  Top Layer w0.381: v1(306.535,183.642) U3.14
  Bottom Layer w0.381: M1.CN7_21 295.842,98.298 309.372,98.298 310.388,99.314 310.388,103.886 311.658,105.156 315.214,105.156 315.849,105.791 315.849,132.842 312.674,136.017 312.674,149.098 317.246,153.67 317.246,166.37 310.896,172.72 310.896,177.8 306.535,182.161 v1(306.535,183.642)
NetM1_CN7_23: M1.CN7_23 TP5.1 | length 10.3
  Top Layer w0.381: TP5.1 295.402,94.234 296.43,95.262 M1.CN7_23
NetM1_CN7_24: M1.CN7_24 R10.1 | length 70.3
  Top Layer w0.5: R10.1 v1(246.126,94.488)
  Bottom Layer w0.5: v1(246.126,94.488) 246.126,107.442 249.428,110.744 270.383,110.744 275.59,105.537 295.148,105.537 296.43,104.255 M1.CN7_24
NetM1_CN7_25: M1.CN7_25 TP6.1 | length 6
  Top Layer w0.381: TP6.1@298.97,94.246 M1.CN7_25
NetM1_CN7_27: M1.CN7_27 TP7.1 | length 6
  Top Layer w0.381: TP7.1 M1.CN7_27@301.498,100.238
NetM1_CN7_28: M1.CN7_28 U1.21 | length 119.9
  Top Layer w0.381: U1.21 267.675,181.975 262.6,176.9 262.6,122.845 268.351,117.094 273.431,117.094 274.828,115.697 v1(274.828,113.03)
  Bottom Layer w0.381: v1(274.828,113.03) 296.47,113.03 297.942,111.558 297.942,106.358 M1.CN7_28
NetM1_CN7_30: M1.CN7_30 U1.20 | length 122.8
  Top Layer w0.381: U1.20 266.405,182.077 261.747,177.419 261.747,122.301 267.716,116.332 272.796,116.332 273.7,115.428 v1(273.7,114.046)
  Bottom Layer w0.381: v1@273.558,114.046 296.754,114.046 298.958,111.842 298.958,106.68 300.838,104.8 302.04,104.8 M1.CN7_30
NetM1_CN7_32: M1.CN7_32 U1.17 | length 124.5
  Top Layer w0.381: U1.17 262.595,179.664 260.858,177.927 260.858,121.793 267.589,115.062 v1(272.542,115.062)
  Bottom Layer w0.381: v1(272.542,115.062) 297.138,115.062 299.974,112.226 299.974,106.934 301.308,105.6 303.78,105.6 M1.CN7_32
NetM1_CN7_34: M1.CN7_34 U3.21 | length 88.7
  Top Layer w0.381: M1.CN7_34 310.4,104.06 310.4,173.875 311.658,175.133 311.658,177.292 315.425,181.059 U3.21
NetM1_CN7_35: M1.CN7_35 U1.22 U2.22 | length 150.7
  Top Layer w0.381: v1(268.945,186.69) U1.22 ; v1(297.445,186.69) U2.22 ; v1(319.786,99.822) v1(319.786,179.07)
  Bottom Layer w0.381: v1(268.945,186.69) v1(297.445,186.69) 318.262,186.69 319.786,185.166 v1(319.786,179.07) ; M1.CN7_35 313.622,98.298 318.262,98.298 v1(319.786,99.822)
NetM1_CN7_36: M1.CN7_36 TP2.1 | length 9.6
  Top Layer w0.381: TP2.1 310.461,95.431 310.461,101.581 M1.CN7_36
NetM1_CN7_37: M1.CN7_37 U3.2 U4.2 | length 198.9
  Top Layer w0.381: U4.2 250.965,201.409 256.751,195.623 283.675,195.623 285.496,193.802 320.802,193.802 ; M1.CN7_37 315.515,100.25 317.5,102.235 317.5,133.604 313.944,137.16 313.944,147.828 318.516,152.4 318.516,180.848 320.802,183.134 320.802,193.802 ; U3.2 317.965,199.941 317.754,200.152 317.754,203.708 318.262,204.216 321.818,204.216 322.58,203.454 322.58,195.58 320.802,193.802
NetM1_CN7_38: M1.CN7_38 TP1.1 | length 9.6
  Top Layer w0.381: TP1.1 312.928,95.504 312.928,101.508 M1.CN7_38
NetM1_CN10_1: M1.CN10_1 U5.21 | length 28.1
  Top Layer w0.381: v1@248.425,161.798 U5.21
  Bottom Layer w0.381: v1(248.412,161.798) 249,161.21 M1.CN10_1
NetM1_CN10_2: M1.CN10_2 U5.20 | length 27.2
  Top Layer w0.381: v1(247.155,163.75) U5.20
  Bottom Layer w0.381: v1(247.155,163.75) M1.CN10_2@268.49,163.75
NetM1_CN10_3: M1.CN10_3 U4.21 | length 56.8
  Top Layer w0.381: v1(248.425,194.31) U4.21 ; v1(269.8,183.9) 269.8,162.44 M1.CN10_3
  Bottom Layer w0.381: v1(248.425,194.31) 248.425,184.772 249.297,183.9 v1(269.8,183.9)
NetM1_CN10_4: M1.CN10_4 U5.18 | length 43.6
  Top Layer w0.381: U5.18 244.603,174.749 245.36,175.51 v1(246.888,175.514) ; M1.CN10_4 v1@271.03,175.514
  Bottom Layer w0.381: v1(246.888,175.514) v1(271,175.514)
NetM1_CN10_5: M1.CN10_5 U4.20 | length 60.3
  Top Layer w0.381: v1(247.155,194.31) U4.20 ; v1(272.3,182.8) 272.3,162.48 M1.CN10_5
  Bottom Layer w0.381: v1(247.155,194.31) 247.155,184.137 248.492,182.8 v1(272.3,182.8)
NetM1_CN10_6: M1.CN10_6 U5.17 | length 49.6
  Top Layer w0.381: U5.17 243.345,175.527 244.602,176.784 v1(246.888,176.784) ; v1(273.304,176.784) 273.57,176.518 M1.CN10_6
  Bottom Layer w0.381: v1(246.888,176.784) v1(273.304,176.784)
NetM1_CN10_8: M1.CN10_8 R6.1 | length 13.4
  Top Layer w0.381: R6.1 275.844,175.514 276.11,175.248 M1.CN10_8
NetM1_CN10_11: M1.CN10_11 U1.16 | length 49
  Top Layer w0.381: U1.16 261.325,190.325 262.1,191.1 276.768,191.1 278.892,188.976 278.892,183.408 279.981,182.319 279.981,162.419 M1.CN10_11
NetM1_CN10_12: M1.CN10_12 U2.17 | length 35
  Top Layer w0.381: M1.CN10_12 v1(281.19,179.4) ; v1(291.095,179.4) U2.17
  Bottom Layer w0.381: v1(281.19,179.4) v1(291.095,179.4)
NetM1_CN10_13: M1.CN10_13 U1.15 | length 53.8
  Top Layer w0.381: U1.15 260.055,191.355 260.9,192.2 277.446,192.2 279.908,189.738 279.908,184.492 282.5,181.9 282.5,162.44 M1.CN10_13
NetM1_CN10_14: M1.CN10_14 U2.18 | length 33.7
  Top Layer w0.381: M1.CN10_14 v1(283.73,178.105) ; v1(292.365,178.105) U2.18
  Bottom Layer w0.381: v1(283.73,178.105) v1(292.365,178.105)
NetM1_CN10_15: M1.CN10_15 U1.14 | length 58.7
  Top Layer w0.381: U1.14 258.785,192.385 259.7,193.3 278.124,193.3 280.924,190.5 280.924,185.376 285,181.3 285,162.48 M1.CN10_15
NetM1_CN10_16: M1.CN10_16 U4.17 | length 74.4
  Top Layer w0.381: v1(243.345,194.323) U4.17 ; M1.CN10_16 v1(286.27,173.228)
  Bottom Layer w0.381: v1(243.345,194.323) 243.345,175.501 245.618,173.228 v1(286.27,173.228)
NetM1_CN10_17: M1.CN10_17 U3.15 | length 41.5
  Top Layer w0.381: v1(291.338,167.894) v1(291.338,173.99) ; v1(301.625,173.99) 301.625,176.911 307.805,183.091 U3.15
  Bottom Layer w0.381: M1.CN10_17 290.068,162.468 290.068,166.624 v1(291.338,167.894) ; v1(291.338,173.99) v1(301.625,173.99)
NetM1_CN10_18: M1.CN10_18 U4.18 | length 76
  Top Layer w0.381: v1(244.615,194.323) U4.18 ; M1.CN10_18 v1(288.81,174.244)
  Bottom Layer w0.381: v1(244.615,194.323) 244.615,176.009 246.38,174.244 v1(288.81,174.244)
NetM1_CN10_19: M1.CN10_19 U5.19 | length 56.4
  Top Layer w0.381: v1@245.885,162.56 U5.19 ; v1(290.9,159.2) 291.35,159.65 M1.CN10_19
  Bottom Layer w0.381: v1(245.872,162.56) 245.872,161.29 247.962,159.2 v1(290.9,159.2)
NetM1_CN10_21: M1.CN10_21 U2.20 | length 28.3
  Top Layer w0.381: M1.CN10_21 295.2,162.52 295.2,176.986 294.905,177.281 U2.20
NetM1_CN10_22: M1.CN10_22 U3.19 | length 41.9
  Top Layer w0.381: M1.CN10_22 v1(293.89,175.514) ; v1(309.118,175.514) 309.118,178.054 312.885,181.821 U3.19
  Bottom Layer w0.381: v1(293.89,175.514) v1(309.118,175.514)
NetM1_CN10_23: M1.CN10_23 U2.21 | length 28.8
  Top Layer w0.381: U2.21 296.175,167.025 297.7,165.5 297.7,162.48 M1.CN10_23
NetM1_CN10_24: M1.CN10_24 U3.20 | length 38.2
  Top Layer w0.381: v1(309.118,167.894) 309.118,173.863 310.388,175.133 310.388,177.8 314.155,181.567 U3.20
  Bottom Layer w0.381: M1.CN10_24 298.18,165.5 307.994,165.5 309.118,166.624 v1(309.118,167.894)
NetM1_CN10_25: M1.CN10_25 U4.19 | length 88.9
  Top Layer w0.381: v1(245.885,194.31) U4.19 ; M1.CN10_25 300.3,162.54 v1(300.3,181.7)
  Bottom Layer w0.381: v1(245.885,194.31) 245.885,183.756 247.866,181.775 v1@300.075,181.775
NetM1_CN10_26: M1.CN10_26 U4.14 | length 89.6
  Top Layer w0.381: v1(239.535,194.31) U4.14 ; M1.CN10_26 v1(298.97,170.168)
  Bottom Layer w0.381: v1(239.535,194.31) 239.535,174.739 244.094,170.18 v1@298.97,170.18
NetM1_CN10_27: M1.CN10_27 U3.17 | length 35.7
  Top Layer w0.381: M1.CN10_27 303.335,159.385 304.546,159.385 305.308,160.147 305.308,177.292 310.345,182.329 U3.17
NetM1_CN10_28: M1.CN10_28 U4.15 | length 91.5
  Top Layer w0.381: v1(240.805,194.323) U4.15 ; M1.CN10_28 v1(301.51,171.184)
  Bottom Layer w0.381: v1(240.805,194.323) 240.805,174.739 244.348,171.196 v1@301.51,171.196
NetM1_CN10_29: M1.CN10_29 U3.16 | length 30.8
  Top Layer w0.381: M1.CN10_29 302.768,162.492 302.768,175.968 309.075,182.275 U3.16
NetM1_CN10_30: M1.CN10_30 U4.16 | length 93.2
  Top Layer w0.381: v1(242.075,194.323) U4.16 ; M1.CN10_30 v1(304.05,172.2)
  Bottom Layer w0.381: v1(242.075,194.323) 242.075,174.993 244.856,172.212 v1@304.05,172.212
NetM1_CN10_31: M1.CN10_31 U3.18 | length 29.7
  Top Layer w0.381: M1.CN10_31 307.921,162.541 307.921,178.381 311.615,182.075 U3.18
NetM1_CN10_33: M1.CN10_33 U2.19 | length 47.4
  Top Layer w0.381: v1(292.6,159.2) 292.6,176.268 293.635,177.303 U2.19
  Bottom Layer w0.381: v1(292.6,159.2) 307.12,159.2 M1.CN10_33
NetM1_CN10_34: M1.CN10_34 U5.16 | length 83.9
  Top Layer w0.381: v1(242.075,165.367) U5.16
  Bottom Layer w0.381: v1(242.075,165.367) 242.075,160.515 244.348,158.242 309.626,158.242 310.388,159.004 310.388,162.492 M1.CN10_34
NetM1_CN10_35: M1.CN10_35 U1.19 | length 74
  Top Layer w0.381: v1(265.135,184.76) U1.19 ; M1.CN10_35 312.928,162.468 v1(312.928,176.53)
  Bottom Layer w0.381: v1(265.135,184.76) 265.201,184.826 309.474,184.826 312.928,181.372 v1(312.928,176.53)
NetM1_CN10_37: M1.CN10_37 U1.18 | length 80.4
  Top Layer w0.381: v1(263.865,185.674) U1.18 ; M1.CN10_37 315.515,161.21 316.484,162.179 v1(316.484,176.53)
  Bottom Layer w0.381: v1(263.865,185.674) 313.826,185.674 316.484,183.016 v1(316.484,176.53)
NetP1_1: P1.1 U9.18 | length 9.5
  Top Layer w0.381: P1.1 280.37,200.87 281.1,201.6 281.1,202.741 284.684,206.325 U9.18
NetP1_2: P1.2 U8.11 | length 7.8
  Top Layer w0.381: U8.11 272.915,203.785 275.83,200.87 P1.2
NetP1_3: P1.3 U9.17 | length 8.3
  Top Layer w0.381: P1.3 280.31,203.41 284.495,207.595 U9.17
NetP1_4: P1.4 U8.12 | length 7.3
  Top Layer w0.381: U8.12 273.645,205.055 275.29,203.41 P1.4
NetP1_5: P1.5 U9.16 | length 7.8
  Top Layer w0.381: P1.5 280.95,205.95 283.865,208.865 U9.16
NetP1_6: P1.6 U8.13 | length 6.7
  Top Layer w0.381: U8.13 274.225,206.325 274.6,205.95 P1.6
NetP1_7: P1.7 U9.15 | length 7.3
  Top Layer w0.381: P1.7 281.59,208.49 283.235,210.135 U9.15
NetP1_8: P1.8 U8.14 | length 7
  Top Layer w0.381: U8.14 274.195,207.595 275.09,208.49 P1.8
NetP1_9: P1.9 U9.14 | length 6.7
  Top Layer w0.381: P1.9 282.33,211.03 282.705,211.405 U9.14
NetP1_10: P1.10 U8.15 | length 7.5
  Top Layer w0.381: U8.15 273.465,208.865 275.63,211.03 P1.10
NetP1_11: P1.11 U9.13 | length 7
  Top Layer w0.381: P1.11 281.63,213.57 282.525,212.675 U9.13
NetP1_12: P1.12 U8.16 | length 8
  Top Layer w0.381: U8.16 272.935,210.135 276.37,213.57 P1.12
NetP1_13: P1.13 U9.12 | length 7.5
  Top Layer w0.381: P1.13 281.29,216.11 283.455,213.945 U9.12
NetP1_14: P1.14 U8.17 | length 9.3
  Top Layer w0.381: U8.17 272.605,211.405 275,213.8 275,215.2 275.91,216.11 P1.14
NetP1_15: P1.15 U9.11 | length 8
  Top Layer w0.381: P1.15 281.05,218.65 284.485,215.215 U9.11
NetP1_16: P1.16 U8.18 | length 10.5
  Top Layer w0.381: U8.18 272.175,212.675 273.8,214.3 273.8,216.8 275.65,218.65 P1.16
NetP1_25: P1.25 U10.18 | length 11.2
  Top Layer w0.381: P1.25 283.7,235.28 283.7,237.92 284.605,238.825 U10.18
NetP1_26: P1.26 U11.11 | length 8.6
  Top Layer w0.381: U11.11 272.295,236.285 P1.26
NetP1_27: P1.27 U10.17 | length 10
  Top Layer w0.381: P1.27 282.51,236.63 282.51,238 284.605,240.095 U10.17
NetP1_28: P1.28 U11.12 | length 8.1
  Top Layer w0.381: U11.12 272.645,237.555 276.31,233.89 P1.28
NetP1_29: P1.29 U10.16 | length 8.7
  Top Layer w0.381: P1.29 279.77,236.53 284.605,241.365 U10.16
NetP1_30: P1.30 U11.13 | length 7.6
  Top Layer w0.381: U11.13 273.075,238.825 275.47,236.43 P1.30
NetP1_31: P1.31 U10.15 | length 8.1
  Top Layer w0.381: P1.31 280.27,238.97 283.935,242.635 U10.15
NetP1_32: P1.32 U11.14 | length 7
  Top Layer w0.381: U11.14 273.405,240.095 274.53,238.97 P1.32
NetP1_33: P1.33 U10.14 | length 7.6
  Top Layer w0.381: P1.33 280.94,241.51 283.335,243.905 U10.14
NetP1_34: P1.34 U11.15 | length 6.6
  Top Layer w0.381: U11.15 273.465,241.365 273.61,241.51 P1.34
NetP1_35: P1.35 U10.13 | length 7
  Top Layer w0.381: P1.35 281.702,244.05 282.827,245.175 U10.13
NetP1_36: P1.36 U11.16 | length 7.2
  Top Layer w0.381: U11.16 273.335,242.635 274.75,244.05 P1.36
NetP1_37: P1.37 U10.12 | length 6.6
  Top Layer w0.381: P1.37 282.61,246.59 282.755,246.445 U10.12
NetP1_38: P1.38 U11.17 | length 7.7
  Top Layer w0.381: U11.17 272.905,243.905 275.59,246.59 P1.38
NetP1_39: P1.39 U10.11 | length 7.2
  Top Layer w0.381: P1.39 281.87,249.13 283.285,247.715 U10.11
NetP1_40: P1.40 U11.18 | length 8.2
  Top Layer w0.381: U11.18 272.353,245.175 276.308,249.13 P1.40
NetR1_1: R1.1 U5.4 U10.1 U11.1 | length 122.4
  Top Layer w0.381: U5.4 248.425,183.025 250.5,185.1 251.775,185.1 255.2,188.525 v1(255.2,191.9) ; v1(261.35,229.489) v1(269.494,229.489) 270.104,230.099 292.456,230.099 293.37,231.013 293.37,233.045 294.243,233.918 R1.1 U10.1@295.656,236.279 ; U11.1 v1(261.35,249.92)
  Bottom Layer w0.381: v1(255.2,191.9) 255.2,205.67 269.494,219.964 v1(269.494,229.489) ; v1(261.35,229.489) v1(261.35,249.92)
NetR2_1: R2.1 U6.30 U7.30 | length 31.4
  Top Layer w0.381: R2.1@262.025,293.725 268.758,293.725 270.053,292.43 U7.30 274.08,293.7 290.54,293.7 U6.30
NetTP8_1: TP8.1 U5.8 | length 8.9
  Top Layer w0.381: TP8.1 241.808,183.388 243.345,181.851 U5.8
NetU5_3: U5.3 U8.19 U9.19 | length 79.9
  Top Layer w0.381: U5.3 249.695,181.623 256.286,188.214 256.286,192.405 258.445,194.564 v1(268.097,194.564) v1(283.21,194.564) ; v1(268.097,214.884) 269.036,213.945 U8.19 ; v1(283.21,198.882) 283.21,203.327 284.938,205.055 U9.19
  Bottom Layer w0.381: v1(268.097,194.564) v1(268.097,214.884) ; v1(283.21,194.564) v1(283.21,198.882)
NetU5_5: U5.5 U12.1 | length 87.5
  Top Layer w0.381: U5.5 247.155,183.855 249.6,186.3 251.5,186.3 v1(253.4,188.2)
  Bottom Layer w0.381: U12.1 248.81,250.11 239.268,240.568 239.268,210.185 250.8,198.653 250.8,190.8 v1(253.4,188.2)
NetU5_6: U5.6 U6.29 U7.29 | length 146.4
  Top Layer w0.381: U5.6 245.885,184.685 249.2,188 251.2,188 253.7,190.5 253.7,192.8 v1(252.8,193.7) ; U7.29 274.89,289.89 276.181,291.181 290.519,291.181 U6.29
  Bottom Layer w0.381: v1(252.8,193.7) 252.8,206.318 267.462,220.98 267.462,288.462 268.89,289.89 U7.29
NetU5_7: U5.7 U6.24 U7.24 | length 133.1
  Top Layer w0.381: U5.7 244.615,185.115 248.7,189.2 250.5,189.2 v1(252.8,191.5) ; U7.24 275.19,277.19 276.475,278.475 290.525,278.475 U6.24
  Bottom Layer w0.381: v1(252.8,191.5) 254.1,192.8 254.1,206.094 268.3,220.294 268.3,276.1 269.39,277.19 U7.24
NetU10_19: U10.19 U11.19 U12.12 | length 87.3
  Top Layer w0.381: v1(265.684,238.252) 268.986,241.554 268.986,245.872 269.559,246.445 U11.19 272.353,246.445 277.114,251.206 286.766,251.206 288.29,249.682 288.29,237.998 287.847,237.555 U10.19
  Bottom Layer w0.381: U12.12 244.706,257.96 245.951,256.715 263.731,256.715 265.684,254.762 v1(265.684,238.252)
ROM_CE#: P1.19 R4.1 U12.2 | length 61.3
  Top Layer w0.381: R4.1 v1@265.659,225 ; v1(265.684,225.025) 278.474,225.025 P1.19
  Bottom Layer w0.381: U12.2 260.962,255.42 264.16,252.222 264.16,226.549 v1(265.684,225.025)
ROM_OE#: P1.17 R5.1 U12.13 | length 70.4
  Top Layer w0.381: R5.1 v1@265.669,222.5 ; v1(265.684,222.485) 278.474,222.485 P1.17
  Bottom Layer w0.381: U12.13 244.706,255.42 245.951,254.175 260.429,254.175 262.89,251.714 262.89,225.279 v1(265.684,222.485)
VIN: R10.2 X1.1 | length 198.5
  Top Layer w0.5: X1.1 234,232.09 237.49,228.6 237.49,218.186 233.68,214.376 233.68,104.648 242.586,95.742 R10.2
pads on no net: M1. M1.CN5_1 M1.CN5_2 M1.CN5_3 M1.CN5_4 M1.CN5_5 M1.CN5_6 M1.CN5_7 M1.CN5_8 M1.CN5_9 M1.CN5_10 M1.CN6_1 M1.CN6_2 M1.CN6_3 M1.CN6_4 M1.CN6_5 M1.CN6_6 M1.CN6_7 M1.CN6_8 M1.CN7_4 M1.CN7_5 M1.CN7_7 M1.CN7_9 M1.CN7_10 M1.CN7_11 M1.CN7_12 M1.CN7_14 M1.CN7_26 M1.CN7_29 M1.CN7_31 M1.CN7_33 M1.CN8_1 M1.CN8_2 M1.CN8_3 M1.CN8_4 M1.CN8_5 M1.CN8_6 M1.CN9_1 M1.CN9_2 M1.CN9_3 M1.CN9_4 M1.CN9_5 M1.CN9_6 M1.CN9_7 M1.CN9_8 M1.CN10_7 M1.CN10_10 M1.CN10_36 M1.CN10_38 U5.9 U5.10 U6.1 U6.2 U7.1 U7.2 U12.6 U12.8

## Polygon pours and split planes (outlines as drawn)
GND on Bottom Layer "Bot-Layer-GND" (solid, pour order 2): 230,303 327,303 327,92 230,92 230,303

## Silkscreen, mask and mechanical layers (free items; w line width, h text height)
Top Overlay:
  text "2403 HDD ROM Emulator" at 321.056,293.37 h3 r270
Mechanical 1:
  the board outline again, w0.254

## Text inside footprints (layer, text, board x,y; h text height)
P1: Top Overlay "40" at 275.833,248.495 h1.02 r90; Mechanical 14 "40" at 275.833,248.495 h1.02 r90
X1: Top Overlay "2" at 231.625,289.45 h1 r90; Top Overlay "1" at 231.625,286.05 h1 r90